# Altium PCB ngu-nghiep.pcbdoc
Units mm, origin at the board's own origin, x right, y up, seen from the top; angles counter-clockwise.
Board outline 41 x 71.22 mm, 2 copper layers (Top Layer, Bottom Layer); 44 components, 16 nets, 328 pads, 16 vias.
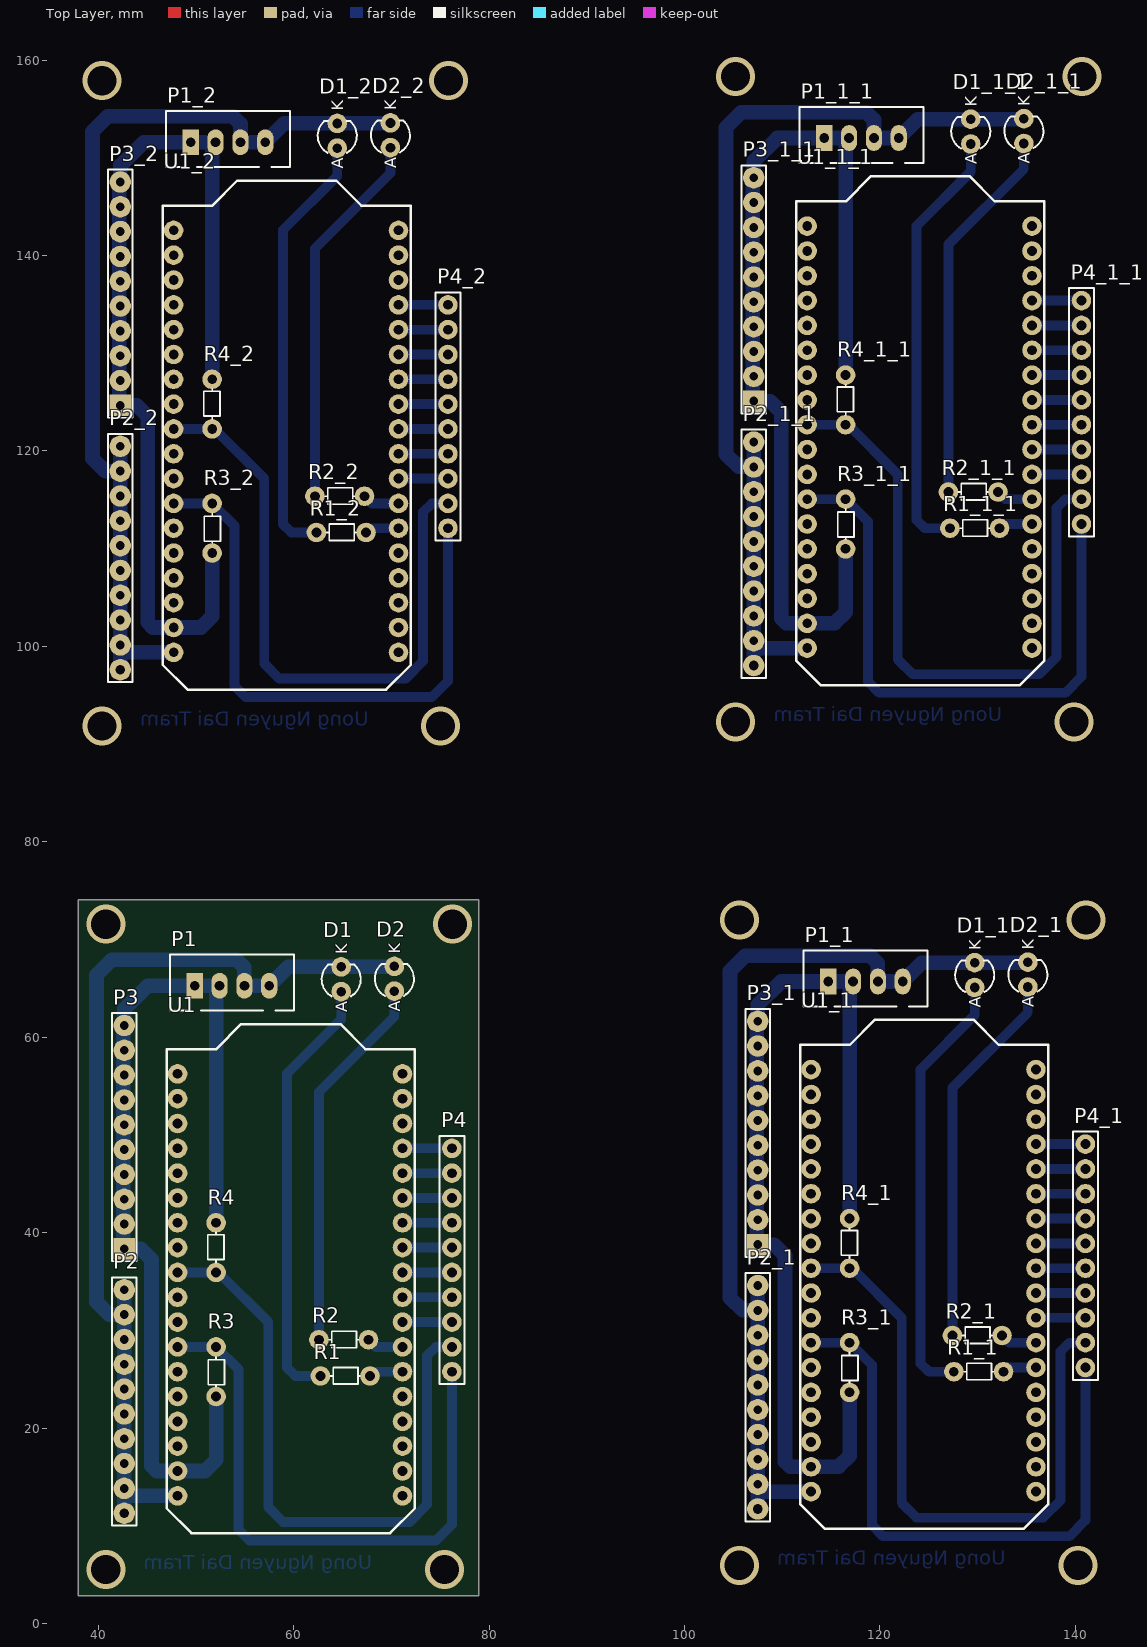
[diagram p0: Top Layer view]
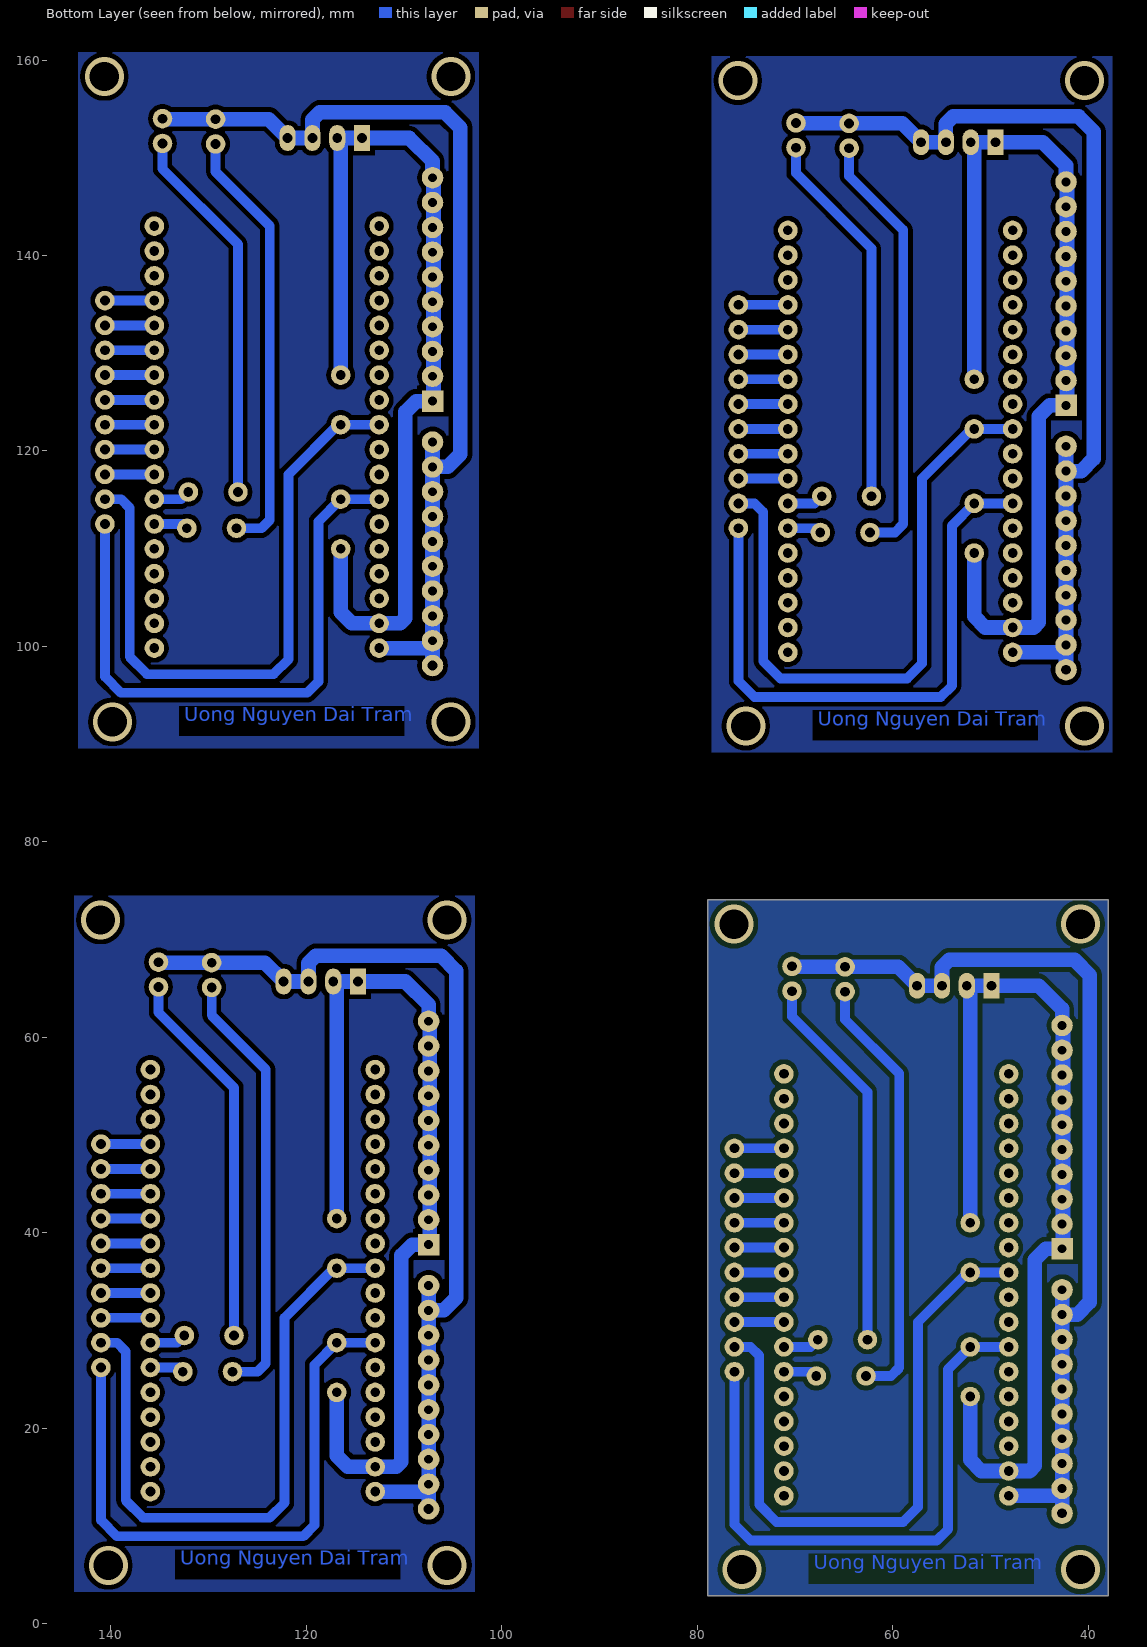
[diagram p1: Bottom Layer view, seen from below]

## Layer stack, top to bottom
Top Solder: solder mask 0.0102, Solder Resist, Dk 3.5
Top Layer: signal copper 0.0356
Dielectric 1: dielectric 0.32, FR-4, Dk 4.8
Bottom Layer: signal copper 0.0356
Bottom Solder: solder mask 0.0102, Solder Resist, Dk 3.5

## Board outline
37.948,2.845 37.948,74.066 78.943,74.066 78.943,2.845

## Design rules (kind name [scope] priority, off if disabled: settings)
Clearance [All] p1: gap=0.5 ignorepadtopadclearanceinfootprint=FALSE
PolygonConnect [All] p1: connectstyle=Relief reliefconductorwidth=0.254 reliefentries=4 polygonreliefangle="90 Angle" airgapwidth=0.254
RoutingLayers [All] p1: top layer_v5=FALSE bottom layer_v5=TRUE
RoutingVias [All] p1: holewidth=0.711 width=1.27 viastyle="Through Hole" minholewidth=0.711 minwidth=1.27 maxholewidth=0.711 maxwidth=1.27
SolderMaskExpansion [All] p1: expansion=0.102
Width Width_3 [InNet('GND')] p1: maxlimit=1.8 minlimit=1.5 preferedwidth=1.5
Width Width_2 [InNet('12V')] p2: maxlimit=1.8 minlimit=1.5 preferedwidth=1.5
Width Width_1 [InNet('5V')] p3: maxlimit=1.8 minlimit=1.5 preferedwidth=1.5
Width [All] p4: maxlimit=1.2 minlimit=1 preferedwidth=1
29 further rules are at their usual default settings.

## Classes and differential pairs
component class Ngu-nghiep: D1 D2 P1 P2 P3 P4 R1 R2 R3 R4 U1

## Components (designator, comment, footprint, x,y, rotation, side; value= is the part's Value field where it differs from the comment)
D1 "LED" LED_3mm 64.872,65.938 r90 top
D1_1 "LED" LED_3mm 129.692,66.37 r90 top (schematic designator D1)
D1_1_1 "LED" LED_3mm 129.286,152.679 r90 top (schematic designator D1)
D1_2 "LED" LED_3mm 64.465,152.248 r90 top (schematic designator D1)
D2 "LED" LED_3mm 70.307,65.989 r90 top
D2_1 "LED" LED_3mm 135.128,66.421 r90 top (schematic designator D2)
D2_1_1 "LED" LED_3mm 134.722,152.73 r90 top (schematic designator D2)
D2_2 "LED" LED_3mm 69.901,152.298 r90 top (schematic designator D2)
P1 "Connector" JST-XH_B4B-XH-A 53.696,65.278 r0 top
P1_1 "Connector" JST-XH_B4B-XH-A 118.516,65.71 r0 top (schematic designator P1)
P1_1_1 "Connector" JST-XH_B4B-XH-A 118.11,152.019 r0 top (schematic designator P1)
P1_2 "Connector" JST-XH_B4B-XH-A 53.289,151.587 r0 top (schematic designator P1)
P2 "Header 10" HDR1X10#1 42.672,11.303 r90 top
P2_1 "Header 10" HDR1X10#1 107.493,11.735 r90 top (schematic designator P2)
P2_1_1 "Header 10" HDR1X10#1 107.086,98.044 r90 top (schematic designator P2)
P2_2 "Header 10" HDR1X10#1 42.266,97.612 r90 top (schematic designator P2)
P3 "Header 10" HDR1X10#2 42.672,38.354 r90 top
P3_1 "Header 10" HDR1X10#2 107.493,38.786 r90 top (schematic designator P3)
P3_1_1 "Header 10" HDR1X10#2 107.086,125.095 r90 top (schematic designator P3)
P3_2 "Header 10" HDR1X10#2 42.266,124.663 r90 top (schematic designator P3)
P4 "Header 10" HDR1X10#3 76.2,25.781 r90 top
P4_1 "Header 10" HDR1X10#3 141.021,26.213 r90 top (schematic designator P4)
P4_1_1 "Header 10" HDR1X10#3 140.614,112.522 r90 top (schematic designator P4)
P4_2 "Header 10" HDR1X10#3 75.794,112.09 r90 top (schematic designator P4)
R1 "1k" R1/8W 65.278,25.349 r0 top value="R1/4W - 1K"
R1_1 "1k" R1/8W 130.099,25.781 r0 top value="R1/4W - 1K" (schematic designator R1)
R1_1_1 "1k" R1/8W 129.692,112.09 r0 top value="R1/4W - 1K" (schematic designator R1)
R1_2 "1k" R1/8W 64.872,111.658 r0 top value="R1/4W - 1K" (schematic designator R1)
R2 "1k" R1/8W 65.126,29.058 r0 top value="R1/4W - 1K"
R2_1 "1k" R1/8W 129.946,29.489 r0 top value="R1/4W - 1K" (schematic designator R2)
R2_1_1 "1k" R1/8W 129.54,115.799 r0 top value="R1/4W - 1K" (schematic designator R2)
R2_2 "1k" R1/8W 64.719,115.367 r0 top value="R1/4W - 1K" (schematic designator R2)
R3 "4k7" R1/8W 52.07,25.781 r270 top value="R1/4W - 1K"
R3_1 "4k7" R1/8W 116.891,26.213 r270 top value="R1/4W - 1K" (schematic designator R3)
R3_1_1 "4k7" R1/8W 116.484,112.522 r270 top value="R1/4W - 1K" (schematic designator R3)
R3_2 "4k7" R1/8W 51.664,112.09 r270 top value="R1/4W - 1K" (schematic designator R3)
R4 "4k7" R1/8W 52.07,38.481 r90 top value="R1/4W - 1K"
R4_1 "4k7" R1/8W 116.891,38.913 r90 top value="R1/4W - 1K" (schematic designator R4)
R4_1_1 "4k7" R1/8W 116.484,125.222 r90 top value="R1/4W - 1K" (schematic designator R4)
R4_2 "4k7" R1/8W 51.664,124.79 r90 top value="R1/4W - 1K" (schematic designator R4)
U1 "ESP32_heltec" ESP32_WFK_Heltec 59.71,34.671 r90 top
U1_1 "ESP32_heltec" ESP32_WFK_Heltec 124.531,35.103 r90 top (schematic designator U1)
U1_1_1 "ESP32_heltec" ESP32_WFK_Heltec 124.124,121.412 r90 top (schematic designator U1)
U1_2 "ESP32_heltec" ESP32_WFK_Heltec 59.304,120.98 r90 top (schematic designator U1)

## Footprints (in the part's own frame and the unit in brackets; to place one, negate y for a bottom-side part, rotate by r counter-clockwise, add the part's x,y. Pads: shape width x height; smd on the part's side, far side on the other; paste and mask are expansions set on the pad)
ESP32_WFK_Heltec [mm]
  round 2 hole 1: 1(-21.59,11.577) 2(-19.05,11.577) 3(-16.51,11.577) 4(-13.97,11.577) 5(-11.43,11.577) 6(-8.89,11.577) 7(-6.35,11.577) 8(-3.81,11.577) 9(-1.27,11.577) 10(1.27,11.577) 11(3.81,11.577) 12(6.35,11.577) 13(8.89,11.577) 14(11.43,11.577) 15(13.97,11.577) 16(16.51,11.577) 17(19.05,11.577) 18(21.59,11.577) 19(21.59,-11.43) 20(19.05,-11.43) 21(16.51,-11.43) 22(13.97,-11.43) 23(11.43,-11.43) 24(8.89,-11.43) 25(6.35,-11.43) 26(3.81,-11.43) 27(1.27,-11.43) 28(-1.27,-11.43) 29(-3.81,-11.43) 30(-6.35,-11.43) 31(-8.89,-11.43) 32(-11.43,-11.43) 33(-13.97,-11.43) 34(-16.51,-11.43) 35(-19.05,-11.43) 36(-21.59,-11.43)
  silkscreen extent -25.4,-12.7 26.67,12.7, body extent -24.6,-12.68 27.15,12.62, height 9.81
HDR1X10#1 [mm]
  round 2.2 hole 1: 1(0,0)
  round 2.2 hole 0.9: 2(2.54,0) 3(5.08,0) 4(7.62,0) 5(10.16,0) 6(12.7,0) 7(15.24,0) 8(17.78,0) 9(20.32,0) 10(22.86,0)
  silkscreen extent -1.27,-1.27 24.13,1.27, body extent -1.27,-1.27 24.13,1.27, height 8.89
HDR1X10#2 [mm]
  rect 2.2x2.2 hole 0.9: 1(0,0)
  round 2.2 hole 0.9: 2(2.54,0) 3(5.08,0) 4(7.62,0) 5(10.16,0) 6(12.7,0) 7(15.24,0) 8(17.78,0) 9(20.32,0) 10(22.86,0)
  silkscreen extent -1.27,-1.27 24.13,1.27, body extent -1.27,-1.27 24.13,1.27, height 8.89
HDR1X10#3 [mm] "Connector; Header; 10 Position"
  round 2 hole 1: 1(0,0) 2(2.54,0) 3(5.08,0) 4(7.62,0) 5(10.16,0) 6(12.7,0) 7(15.24,0) 8(17.78,0) 9(20.32,0) 10(22.86,0)
  silkscreen extent -1.27,-1.27 24.13,1.27
JST-XH_B4B-XH-A [mm] "JST; XH series; 4 circuit; 2.54 Pitch; Through-hole type; Top entry"
  rect 1.65x2.65 hole 1: 1(-3.81,0)
  oval 1.65x2.65 hole 1: 2(-1.27,0) 3(1.27,0) 4(3.81,0)
  silkscreen extent -6.35,-2.54 6.35,3.17, body extent -6.2,-2.57 6.2,3.18, height 7
LED_3mm [mm]
  round 2 hole 1: 1(-1.27,0) 2(1.27,0)
  silkscreen extent -1.75,-2 1.51,2, body extent -1.98,-2 1.51,1.99, height 5.2
R1/8W [mm] "R 1/8W, 2 pin, 300mil"
  round 2 hole 1: 1(-2.54,0) 2(2.54,0)
  silkscreen extent -1.52,-0.81 1.55,0.86, body extent -3.43,-0.9 3.43,0.94, height 2.19

## Part data
D1 D1_1 D1_1_1 D1_2 D2 D2_1 D2_1_1 D2_2: "Typical INFRARED GaAs LED", LatestRevisionDate=08-Jul-2005, LatestRevisionNote="Mech Layer 1 removed.", PackageReference=LED-0, Published=8-Jun-2000, Publisher="Altium Limited"
P1 P1_1 P1_1_1 P1_2: library part Connector_4pin
P2 P2_1 P2_1_1 P2_2 P3 P3_1 P3_1_1 P3_2 P4 P4_1 P4_1_1 P4_2: "Header, 10-Pin", LatestRevisionDate=17-Jul-2002, LatestRevisionNote="Re-released for DXP Platform.", Publisher="Altium Limited"
R1 R1_1 R1_1_1 R1_2 R2 R2_1 R2_1_1 R2_2 R3 R3_1 R3_1_1 R3_2 R4 R4_1 R4_1_1 R4_2: library part R, "Resistor 1/4W"
U1 U1_1 U1_1_1 U1_2: "ESP32 IOT kit"

## Via types
v1: diameter 4, hole 3, Top Layer to Bottom Layer, 16 vias

## Nets (pads, with @x,y where several pads share a name; then routed paths per layer and width w, separated by ;. In a path a pad name is that pad's centre, name@x,y a point inside that pad or via, vN(x,y) a via of type N, cw(c..) or ccw(c..) an arc to the next point about the centre after c; other vN are vias at no path point)
5V: P1.1 P1.2 P3.1 P3.2 P3.3 P3.4 P3.5 P3.6 P3.7 P3.8 P3.9 P3.10 R3.2 R4.2 U1.2 | length 97.9
  Bottom Layer w1.5: R3.2 52.07,16.764 50.927,15.621 U1.2 45.999,15.621 45.466,16.154 45.466,37.236 44.348,38.354 42.57,38.354 42.57,40.894 42.57,43.434 42.57,45.974 42.57,48.514 42.57,51.054 42.57,53.594 42.57,56.134 42.57,58.674 42.57,61.214 42.672,61.316 42.672,62.89 45.06,65.278 P1.1 P1.2 52.07,64.922 R4.2
Alarm: R1.2 U1.31 | length 3.5
  Bottom Layer w1: R1.2 68.25,25.781 U1.31
Error: R2.2 U1.30 | length 3.8
  Bottom Layer w1: R2.2 68.402,28.321 U1.30
GND: D1.2 D2.2 P1.3 P1.4 P2.1 P2.2 P2.3 P2.4 P2.5 P2.6 P2.7 P2.8 P2.9 P2.10 U1.1 | length 99.6
  Bottom Layer w1.5: P2.1 P2.2 ; P2.10 P2.9 ; U1.1 43.434,13.081 P2.2 ; D2.2 70.256,67.208 D1.2 59.436,67.208 P1.4 P1.3 54.966,67.158 54.204,67.92 41.402,67.92 39.827,66.345 39.827,32.918 41.123,31.623 P2.9 ; P2.2 P2.3 P2.4 P2.5 P2.6 P2.7 P2.8 P2.9
NetD1_1: D1.1 R1.1 | length 44.5
  Bottom Layer w1: R1.1 60.173,25.349 59.334,26.187 59.334,56.286 64.872,61.824 D1.1
NetD2_1: D2.1 R2.1 | length 38.9
  Bottom Layer w1: R2.1 62.586,54.407 70.307,62.128 D2.1
SCL: P4.1 R3.1 U1.7 | length 62.1
  Bottom Layer w1: U1.7 51.816,28.321 R3.1@51.943,28.194 ; R3.1 54.356,26.035 54.356,9.652 55.499,8.509 74.549,8.509 76.2,10.16 P4.1
SDA: P4.2 R4.1 U1.10 | length 66.1
  Bottom Layer w1: U1.10 R4.1 52.324,35.941 57.404,30.861 57.404,11.938 58.928,10.414 71.882,10.414 73.66,12.192 73.66,27.432 74.549,28.321 P4.2
SERVO_1: P4.4 U1.28 | length 5.1
  Bottom Layer w1: U1.28 P4.4
SERVO_2: P4.5 U1.27 | length 5.1
  Bottom Layer w1: U1.27 P4.5
SS1: P4.6 U1.26 | length 5.1
  Bottom Layer w1: U1.26 P4.6
SS2: P4.7 U1.25 | length 5.1
  Bottom Layer w1: U1.25 P4.7
SS3: P4.3 U1.29 | length 5.1
  Bottom Layer w1: U1.29 P4.3
SW: P4.10 U1.22 | length 5.1
  Bottom Layer w1: U1.22 P4.10
VRx: P4.8 U1.24 | length 5.1
  Bottom Layer w1: U1.24 P4.8
VRy: P4.9 U1.23 | length 5.1
  Bottom Layer w1: U1.23 P4.9
pads on no net: D1_1.1 D1_1.2 D1_1_1.1 D1_1_1.2 D1_2.1 D1_2.2 D2_1.1 D2_1.2 D2_1_1.1 D2_1_1.2 D2_2.1 D2_2.2 P1_1.1 P1_1.2 P1_1.3 P1_1.4 P1_1_1.1 P1_1_1.2 P1_1_1.3 P1_1_1.4 P1_2.1 P1_2.2 P1_2.3 P1_2.4 P2_1.1 P2_1.2 P2_1.3 P2_1.4 P2_1.5 P2_1.6 P2_1.7 P2_1.8 P2_1.9 P2_1.10 P2_1_1.1 P2_1_1.2 P2_1_1.3 P2_1_1.4 P2_1_1.5 P2_1_1.6 P2_1_1.7 P2_1_1.8 P2_1_1.9 P2_1_1.10 P2_2.1 P2_2.2 P2_2.3 P2_2.4 P2_2.5 P2_2.6 P2_2.7 P2_2.8 P2_2.9 P2_2.10 P3_1.1 P3_1.2 P3_1.3 P3_1.4 P3_1.5 P3_1.6 P3_1.7 P3_1.8 P3_1.9 P3_1.10 P3_1_1.1 P3_1_1.2 P3_1_1.3 P3_1_1.4 P3_1_1.5 P3_1_1.6 P3_1_1.7 P3_1_1.8 P3_1_1.9 P3_1_1.10 P3_2.1 P3_2.2 P3_2.3 P3_2.4 P3_2.5 P3_2.6 P3_2.7 P3_2.8 P3_2.9 P3_2.10 P4_1.1 P4_1.2 P4_1.3 P4_1.4 P4_1.5 P4_1.6 P4_1.7 P4_1.8 P4_1.9 P4_1.10 P4_1_1.1 P4_1_1.2 P4_1_1.3 P4_1_1.4 P4_1_1.5 P4_1_1.6 P4_1_1.7 P4_1_1.8 P4_1_1.9 P4_1_1.10 P4_2.1 P4_2.2 P4_2.3 P4_2.4 P4_2.5 P4_2.6 P4_2.7 P4_2.8 P4_2.9 P4_2.10 R1_1.1 R1_1.2 R1_1_1.1 R1_1_1.2 R1_2.1 R1_2.2 R2_1.1 R2_1.2 R2_1_1.1 R2_1_1.2 R2_2.1 R2_2.2 R3_1.1 R3_1.2 R3_1_1.1 R3_1_1.2 R3_2.1 R3_2.2 R4_1.1 R4_1.2 R4_1_1.1 R4_1_1.2 R4_2.1 R4_2.2 U1.3 U1.4 U1.5 U1.6 U1.8 U1.9 U1.11 U1.12 U1.13 U1.14 U1.15 U1.16 U1.17 U1.18 U1.19 U1.20 U1.21 U1.32 U1.33 U1.34 U1.35 U1.36 U1_1.1 U1_1.2 U1_1.3 U1_1.4 U1_1.5 U1_1.6 U1_1.7 U1_1.8 U1_1.9 U1_1.10 U1_1.11 U1_1.12 U1_1.13 U1_1.14 U1_1.15 U1_1.16 U1_1.17 U1_1.18 U1_1.19 U1_1.20 U1_1.21 U1_1.22 U1_1.23 U1_1.24 U1_1.25 U1_1.26 U1_1.27 U1_1.28 U1_1.29 U1_1.30 U1_1.31 U1_1.32 U1_1.33 U1_1.34 U1_1.35 U1_1.36 U1_1_1.1 U1_1_1.2 U1_1_1.3 U1_1_1.4 U1_1_1.5 U1_1_1.6 U1_1_1.7 U1_1_1.8 U1_1_1.9 U1_1_1.10 U1_1_1.11 U1_1_1.12 U1_1_1.13 U1_1_1.14 U1_1_1.15 U1_1_1.16 U1_1_1.17 U1_1_1.18 U1_1_1.19 U1_1_1.20 U1_1_1.21 U1_1_1.22 U1_1_1.23 U1_1_1.24 U1_1_1.25 U1_1_1.26 U1_1_1.27 U1_1_1.28 U1_1_1.29 U1_1_1.30 U1_1_1.31 U1_1_1.32 U1_1_1.33 U1_1_1.34 U1_1_1.35 U1_1_1.36 U1_2.1 U1_2.2 U1_2.3 U1_2.4 U1_2.5 U1_2.6 U1_2.7 U1_2.8 U1_2.9 U1_2.10 U1_2.11 U1_2.12 U1_2.13 U1_2.14 U1_2.15 U1_2.16 U1_2.17 U1_2.18 U1_2.19 U1_2.20 U1_2.21 U1_2.22 U1_2.23 U1_2.24 U1_2.25 U1_2.26 U1_2.27 U1_2.28 U1_2.29 U1_2.30 U1_2.31 U1_2.32 U1_2.33 U1_2.34 U1_2.35 U1_2.36
copper on no net: | length 1370.6
  Bottom Layer w1: 47.727,114.63 51.41,114.63 51.537,114.503 ; 47.727,122.25 51.664,122.25 51.918,122.25 56.998,117.17 56.998,98.247 58.522,96.723 71.476,96.723 73.254,98.501 73.254,113.741 74.143,114.63 75.794,114.63 ; 51.664,114.63 53.95,112.344 53.95,95.961 55.093,94.818 74.143,94.818 75.794,96.469 75.794,112.09 ; 62.179,115.367 62.179,140.716 69.901,148.438 69.901,151.028 ; 62.332,111.658 59.766,111.658 58.928,112.497 58.928,142.596 64.465,148.133 64.465,150.978 ; 67.259,115.367 67.996,114.63 70.734,114.63 ; 67.412,111.658 67.843,112.09 70.734,112.09 ; 70.734,117.17 75.794,117.17 ; 70.734,119.71 75.794,119.71 ; 70.734,122.25 75.794,122.25 ; 70.734,124.79 75.794,124.79 ; 70.734,127.33 75.794,127.33 ; 70.734,129.87 75.794,129.87 ; 70.734,132.41 75.794,132.41 ; 70.734,134.95 75.794,134.95 ; 112.547,115.062 116.23,115.062 116.357,114.935 ; 112.547,122.682 116.484,122.682 116.738,122.682 121.818,117.602 121.818,98.679 123.342,97.155 136.296,97.155 138.074,98.933 138.074,114.173 138.963,115.062 140.614,115.062 ; 112.954,28.753 116.637,28.753 116.764,28.626 ; 112.954,36.373 116.891,36.373 117.145,36.373 122.225,31.293 122.225,12.37 123.749,10.846 136.703,10.846 138.481,12.624 138.481,27.864 139.37,28.753 141.021,28.753 ; 116.484,115.062 118.77,112.776 118.77,96.393 119.913,95.25 138.963,95.25 140.614,96.901 140.614,112.522 ; 116.891,28.753 119.177,26.467 119.177,10.084 120.32,8.941 139.37,8.941 141.021,10.592 141.021,26.213 ; 127,115.799 127,141.148 134.722,148.869 134.722,151.46 ; 127.152,112.09 124.587,112.09 123.749,112.928 123.749,143.027 129.286,148.565 129.286,151.409 ; 127.406,29.489 127.406,54.839 135.128,62.56 135.128,65.151 ; 127.559,25.781 124.993,25.781 124.155,26.619 124.155,56.718 129.692,62.255 129.692,65.1 ; 132.08,115.799 132.817,115.062 135.554,115.062 ; 132.232,112.09 132.664,112.522 135.554,112.522 ; 132.486,29.489 133.223,28.753 135.961,28.753 ; 132.639,25.781 133.071,26.213 135.961,26.213 ; 135.554,117.602 140.614,117.602 ; 135.554,120.142 140.614,120.142 ; 135.554,122.682 140.614,122.682 ; 135.554,125.222 140.614,125.222 ; 135.554,127.762 140.614,127.762 ; 135.554,130.302 140.614,130.302 ; 135.554,132.842 140.614,132.842 ; 135.554,135.382 140.614,135.382 ; 135.961,31.293 141.021,31.293 ; 135.961,33.833 141.021,33.833 ; 135.961,36.373 141.021,36.373 ; 135.961,38.913 141.021,38.913 ; 135.961,41.453 141.021,41.453 ; 135.961,43.993 141.021,43.993 ; 135.961,46.533 141.021,46.533 ; 135.961,49.073 141.021,49.073
  Bottom Layer w1.5: 42.266,97.612 42.266,100.152 ; 42.266,120.472 42.266,117.932 ; 47.727,99.39 43.028,99.39 42.266,100.152 ; 51.664,109.55 51.664,103.073 50.521,101.93 47.727,101.93 45.593,101.93 45.06,102.464 45.06,123.546 43.942,124.663 42.164,124.663 42.164,127.203 42.164,129.743 42.164,132.283 42.164,134.823 42.164,137.363 42.164,139.903 42.164,142.443 42.164,144.983 42.164,147.523 42.266,147.625 42.266,149.2 44.653,151.587 49.479,151.587 52.019,151.587 51.664,151.232 51.664,127.33 ; 69.901,153.568 69.85,153.518 64.465,153.518 59.03,153.518 57.099,151.587 54.559,151.587 54.559,153.467 53.797,154.229 40.996,154.229 39.421,152.654 39.421,119.228 40.716,117.932 42.266,117.932 ; 107.086,98.044 107.086,100.584 ; 107.086,120.904 107.086,118.364 ; 107.493,11.735 107.493,14.275 ; 107.493,34.595 107.493,32.055 ; 112.547,99.822 107.848,99.822 107.086,100.584 ; 112.954,13.513 108.255,13.513 107.493,14.275 ; 116.484,109.982 116.484,103.505 115.341,102.362 112.547,102.362 110.414,102.362 109.88,102.895 109.88,123.977 108.763,125.095 106.985,125.095 106.985,127.635 106.985,130.175 106.985,132.715 106.985,135.255 106.985,137.795 106.985,140.335 106.985,142.875 106.985,145.415 106.985,147.955 107.086,148.057 107.086,149.631 109.474,152.019 114.3,152.019 116.84,152.019 116.484,151.663 116.484,127.762 ; 116.891,23.673 116.891,17.196 115.748,16.053 112.954,16.053 110.82,16.053 110.287,16.586 110.287,37.668 109.169,38.786 107.391,38.786 107.391,41.326 107.391,43.866 107.391,46.406 107.391,48.946 107.391,51.486 107.391,54.026 107.391,56.566 107.391,59.106 107.391,61.646 107.493,61.747 107.493,63.322 109.88,65.71 114.706,65.71 117.246,65.71 116.891,65.354 116.891,41.453 ; 134.722,154 134.671,153.949 129.286,153.949 123.85,153.949 121.92,152.019 119.38,152.019 119.38,153.899 118.618,154.661 105.816,154.661 104.242,153.086 104.242,119.659 105.537,118.364 107.086,118.364 ; 135.128,67.691 135.077,67.64 129.692,67.64 124.257,67.64 122.326,65.71 119.786,65.71 119.786,67.589 119.024,68.351 106.223,68.351 104.648,66.777 104.648,33.35 105.943,32.055 107.493,32.055 ; 42.266,100.152 42.266,102.692 42.266,105.232 42.266,107.772 42.266,110.312 42.266,112.852 42.266,115.392 42.266,117.932 ; 107.086,100.584 107.086,103.124 107.086,105.664 107.086,108.204 107.086,110.744 107.086,113.284 107.086,115.824 107.086,118.364 ; 107.493,14.275 107.493,16.815 107.493,19.355 107.493,21.895 107.493,24.435 107.493,26.975 107.493,29.515 107.493,32.055
  other v1: 40.792,5.537 75.438,5.537 105.613,5.969 140.259,5.969 40.792,71.577 76.251,71.577 105.613,72.009 141.072,72.009 40.386,91.846 75.032,91.846 105.207,92.278 139.852,92.278 40.386,157.886 75.844,157.886 105.207,158.318 140.665,158.318

## Polygon pours and split planes (outlines as drawn)
no net on Bottom Layer (solid, pour order 12): 37.541,89.154 37.541,160.376 78.537,160.376 78.537,89.154
no net on Bottom Layer (solid, pour order 10): 102.362,89.586 102.362,160.807 143.358,160.807 143.358,89.586
no net on Bottom Layer (solid, pour order 8): 102.768,3.277 102.768,74.498 143.764,74.498 143.764,3.277
no net on Bottom Layer (solid, pour order 6): 37.948,2.845 37.948,74.066 78.943,74.066 78.943,2.845

## Other copper
Bottom Layer:
  text "Uong Nguyen Dai Tram" at 132.486,91.821 h2.5
  text "Uong Nguyen Dai Tram" at 67.666,91.389 h2.5
  text "Uong Nguyen Dai Tram" at 132.893,5.512 h2.5
  text "Uong Nguyen Dai Tram" at 68.072,5.08 h2.5

## Silkscreen, mask and mechanical layers (free items; w line width, h text height)
Drill Drawing:
  lines w0.5: 37.541,89.154 37.541,160.376 78.537,160.376 78.537,89.154 37.541,89.154 ; 37.948,2.845 78.943,2.845 78.943,74.066 37.948,74.066 37.948,2.845 ; 102.362,89.586 143.358,89.586 143.358,160.807 102.362,160.807 102.362,89.586 ; 102.768,3.277 102.768,74.498 143.764,74.498 143.764,3.277 102.768,3.277

## Text inside footprints (layer, text, board x,y; h text height)
D1: Top Overlay "A" at 65.472,62.588 h1.2 r90; Top Overlay "K" at 65.472,68.488 h1.2 r90
D1_1: Top Overlay "K" at 130.292,68.92 h1.2 r90; Top Overlay "A" at 130.292,63.02 h1.2 r90
D1_1_1: Top Overlay "K" at 129.886,155.229 h1.2 r90; Top Overlay "A" at 129.886,149.329 h1.2 r90
D1_2: Top Overlay "K" at 65.065,154.798 h1.2 r90; Top Overlay "A" at 65.065,148.898 h1.2 r90
D2: Top Overlay "A" at 70.907,62.639 h1.2 r90; Top Overlay "K" at 70.907,68.539 h1.2 r90
D2_1: Top Overlay "K" at 135.728,68.971 h1.2 r90; Top Overlay "A" at 135.728,63.071 h1.2 r90
D2_1_1: Top Overlay "K" at 135.322,155.28 h1.2 r90; Top Overlay "A" at 135.322,149.38 h1.2 r90
D2_2: Top Overlay "K" at 70.501,154.848 h1.2 r90; Top Overlay "A" at 70.501,148.948 h1.2 r90